# EAGLE board test1 (EAGLE 6.5.0)
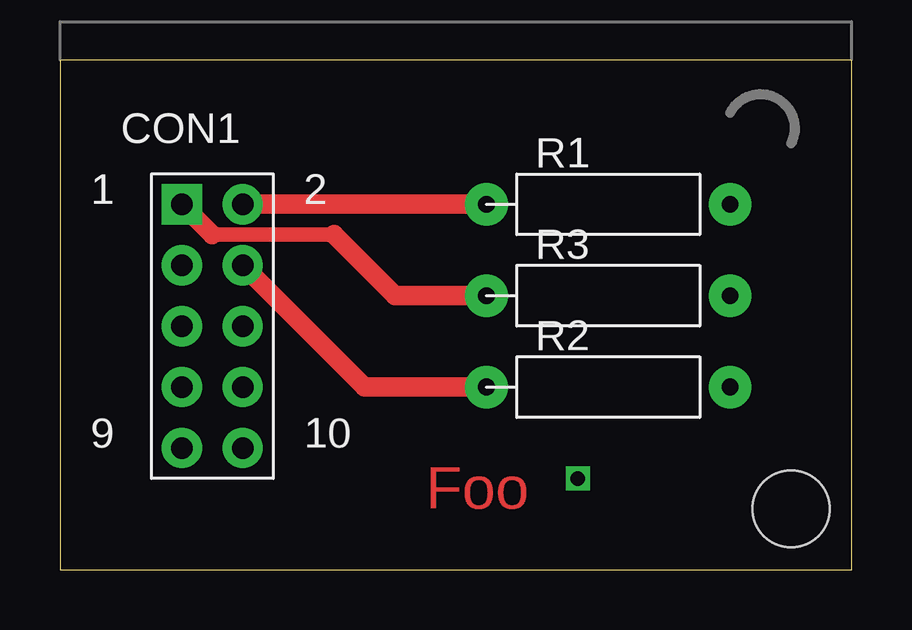
[diagram p0: board, top side]

Size 33 x 21.26 mm. Coordinates in mm from the lower left corner, seen from the top.
Outline: 0,0 33,0 33,21.26 0,21.26 0,0
Copper layers (1*16): Top 0.035mm / dielectric 1.5mm / Bottom 0.035mm
Design rules "default": minimum track width 10mil, minimum drill 24mil, track to track 8mil, track to pad 8mil, pad to pad 8mil, via to via 8mil, smd to smd 8mil, copper to edge 40mil, drill to drill 8mil, minimum pad ring 10mil, minimum via ring 8mil, stop-mask expansion 4mil, vias tented up to drill 0mil, thermal gap 10mil
Holes 3.2 mm at 30.48,2.54

## Footprints (pad centres in the part's own frame; a part is rotated, then mirrored left to right if it is on the bottom)
CON-HDR-2X5 = drill 0.9 pad 1.676 square: 1 -1.27,5.08 | drill 0.9 pad 1.676: 2 1.27,5.08; 3 -1.27,2.54; 4 1.27,2.54; 5 -1.27,0; 6 1.27,0; 7 -1.27,-2.54; 8 1.27,-2.54; 9 -1.27,-5.08; 10 1.27,-5.08
AXIAL04 = drill 0.7 pad 1.778: 1 -5.08,0; 2 5.08,0

## Placement (x,y rotation side)
CON1  [CON-HDR-2X5]  6.35,10.16 0 top
R1  [AXIAL04]  22.86,15.24 0 top
R2  [AXIAL04]  22.86,7.62 0 top
R3  [AXIAL04]  22.86,11.43 0 top

## Library data of the parts
CON1 R1-R3 = steves

## Nets
N$1: CON1.1 R3.1
N$2: CON1.2 R1.1
N$3: CON1.4 R2.1

## Tracks (layer width: path | path; a pad name or v marks a point on that pad's centre or on a via)
N$1
  Top 0.61: 6.35,13.97 11.43,13.97
  Top 0.813: CON1.1 6.35,13.97 | 11.43,13.97 13.97,11.43 R3.1
N$2
  Top 0.813: CON1.2 R1.1
N$3
  Top 0.813: CON1.4 12.7,7.62 R2.1
N$4  (via drill 0.6)
  other vias: 21.59,3.81

## Text on the board
Top: Foo